# Altium PCB lagd_pcb.PcbDoc (part 7 of 7)
Units mm, origin at the board's own origin, x right, y up, seen from the top; angles counter-clockwise.
Board outline 172 x 145 mm, 6 copper layers (Top Layer, Layer 1, Layer 2, Layer 3, Layer 4, Bottom Layer), stack 0.816 mm thick; 588 components, 338 nets, 2165 pads, 565 vias.
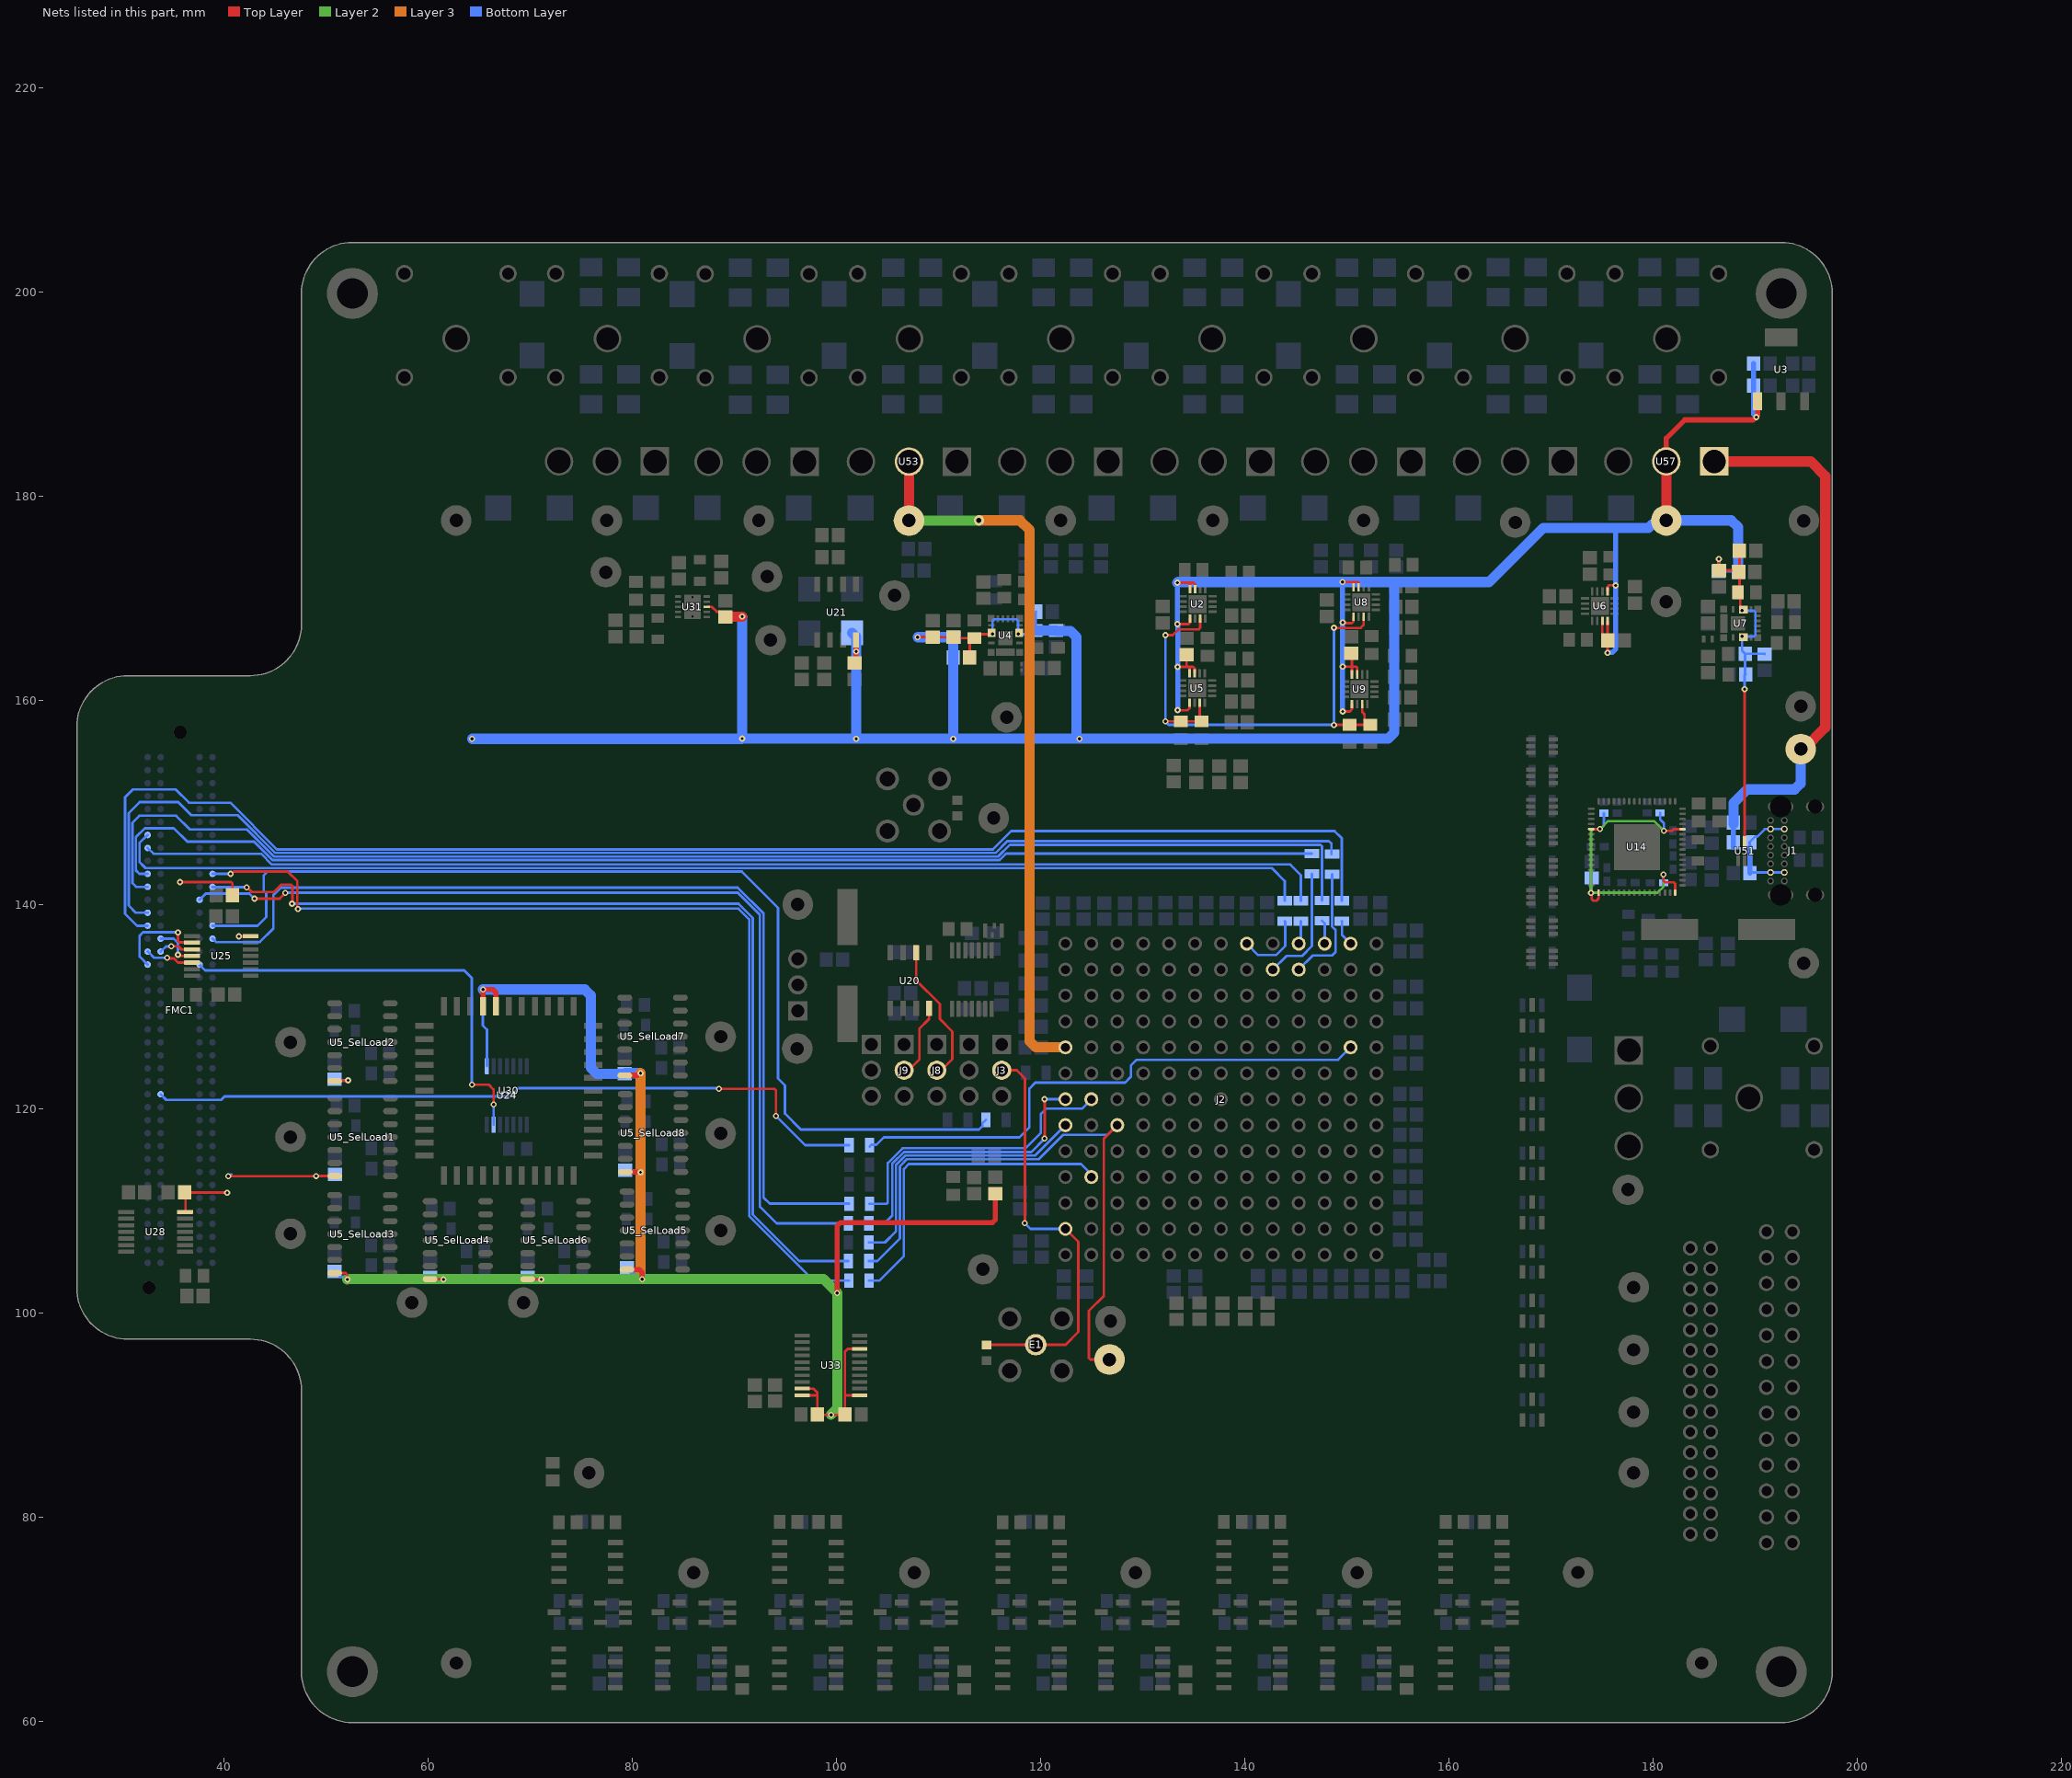
[diagram p10: the nets of this part, all layers, seen from the top]

## Via types
v1: diameter 0.6, hole 0.3, Top Layer to Bottom Layer, tented both sides, 505 vias
v2: diameter 0.3, hole 0.3, Top Layer to Bottom Layer, 20 vias
v3: diameter 0.55, hole 0.3, Top Layer to Bottom Layer, tented both sides, 18 vias
v4: diameter 0.55, hole 0.2, Top Layer to Bottom Layer, 16 vias
v5: diameter 0.6/0.6/0.6/0.6/0.6/0.6 (per signal layer), hole 0.3, Top Layer to Bottom Layer, tented both sides, 2 vias
v6: diameter 0.55/0.55/0.55/0.55/0.55/0.55 (per signal layer), hole 0.3, Top Layer to Bottom Layer, tented both sides, 2 vias
v7: diameter 1, hole 0.5, Top Layer to Bottom Layer, tented both sides, 2 vias

## Nets (pads, with @x,y where several pads share a name; then routed paths per layer and width w, separated by ;. In a path a pad name is that pad's centre, name@x,y a point inside that pad or via, vN(x,y) a via of type N, cw(c..) or ccw(c..) an arc to the next point about the centre after c; other vN are vias at no path point) (continued)
PLL_CFG_VLD_STRB_BUF: J2.F1 R87.2 | length 27.8
  Bottom Layer w0.25: R87.2@103.175,106.9 104.75,106.9 105.82,107.97 105.82,114.466 106.765,115.41 119.453,115.41 J2.F1@122.427,118.384
PLL_DATA_I: FMC1.C10 R39.1 | length 97.7
  Top Layer w0.25: v1(40.625,143) 40.72,143 40.942,143.223 46.227,143.223 47.175,142.275 47.175,139.613 v1(47.24,139.548)
  Bottom Layer w0.25: FMC1.C10@38.862,143.002 FMC1.C10@38.862,143.002 40.624,143.001 v1(40.625,143) ; v1(47.24,139.548) 47.29,139.598 90.393,139.598 91.45,138.54 91.45,109.48 97.78,103.15 R39.1@101.2,103.15
PLL_DATA_I_BUF: J2.D2 R39.2 | length 32.2
  Bottom Layer w0.25: R39.2@103.2,103.15 104.175,103.15 106.6,105.575 106.6,114.1 107.075,114.575 123.95,114.575 J2.D2@125.198,113.327
PLL_DATA_O: FMC1.C11 R86.1 | length 96.2
  Top Layer w0.25: v1(42.221,141.689) 42.249,141.689 42.712,141.225 44.9,141.225 45.625,141.95 46.55,141.95 46.696,141.804 46.696,140.119 v1(46.65,140.073)
  Bottom Layer w0.25: FMC1.C11@38.862,141.732 38.884,141.71 42.199,141.71 v1(42.221,141.689) ; v1(46.65,140.073) 90.413,140.073 91.8,138.685 91.8,109.625 96.35,105.075 R86.1@101.175,105.075
PLL_DATA_O_BUF: J2.F3 PDO.1 R86.2 | length 60
  Top Layer w0.25: PDO.1@126.75,95.425 124.871,95.425 124.725,95.571 124.725,100.2 126.2,101.675 126.2,117.077 J2.F3@127.507,118.384
  Bottom Layer w0.25: R86.2@103.175,105.075 104,105.075 106.2,107.275 106.2,114.35 106.91,115.06 119.835,115.06 122.214,117.439 126.562,117.439 J2.F3@127.507,118.384
PLL_LOCK: FMC1.C15 R85.1 | length 95.7
  Bottom Layer w0.25: FMC1.C15@38.862,136.652 38.876,136.652 39.203,136.325 43.5,136.325 44.825,137.65 44.825,140.925 45.548,141.648 90.322,141.648 92.85,139.12 92.85,111.3 93.45,110.7 R85.1@101.225,110.7
PLL_LOCK_BUF: J2.G2 R85.2 | length 29.3
  Bottom Layer w0.25: R85.2@103.225,110.675 104.879,110.675 105.025,110.821 105.025,114.66 106.49,116.125 118.525,116.125 120.025,117.625 120.025,119.5 120.525,120 124.043,120 J2.G2@124.967,120.924
PLL_STRB: FMC1.D12 R43.1 | length 94.4
  Top Layer w0.25: v1(42.975,140.575) 45.452,140.575 v1(46,141.123)
  Bottom Layer w0.25: FMC1.D12@37.592,140.462 38.205,141.075 42.475,141.075 v1(42.975,140.575) ; v1(46,141.123) 46.027,141.15 90.325,141.15 92.5,138.975 92.5,110.4 94.125,108.775 R43.1@101.175,108.775
PLL_STRB_BUF: J2.G1 R43.2 | length 29.5
  Top Layer w0.25: v1(120.375,117.087) 120.394,117.106 120.394,120.906 v1(120.375,120.925)
  Bottom Layer w0.25: R43.2@103.175,108.775 104.7,108.775 105.47,109.545 105.47,114.61 106.62,115.76 119.085,115.76 120.375,117.05 v1(120.375,117.087) ; v1(120.375,120.925) J2.G1@122.427,120.924
RST_NI: FMC1.G27 R1.1 | length 71.9
  Top Layer w0.25: v1(88.475,121.95) 88.487,121.938 93.929,121.938 94.075,121.791 v1(94.075,119.273)
  Bottom Layer w0.25: FMC1.G27@33.782,121.412 34.327,120.867 39.717,120.867 40.05,121.2 68.02,121.2 68.82,122 88.425,122 v1(88.475,121.95) ; v1(94.075,119.273) 96.923,116.425 R1.1@101.225,116.425
RST_NI_BUF: J2.J12 R1.2 | length 54
  Bottom Layer w0.25: R1.2@103.25,116.3 103.414,116.464 103.914,116.464 104.65,117.2 117.925,117.2 118.9,118.175 118.9,121.974 119.48,122.554 128.279,122.554 128.842,123.117 128.842,124.214 129.417,124.789 149.152,124.789 J2.J12@150.367,126.004
RTC_I: FMC1.C14 R84.1 | length 103.1
  Bottom Layer w0.25: FMC1.C14@38.862,137.922 43.272,137.922 44.125,138.775 44.125,141.107 43.875,141.357 43.875,142.826 44.271,143.223 45.25,143.223 90.727,143.223 94.275,139.675 94.275,122.962 94.95,122.287 94.95,119.52 96.505,117.965 113.965,117.965 114.29,118.29 114.29,118.565 R84.1@114.625,118.9
RTC_MUXED: E1.1 J2.B1 J3.2 R2.2 | length 41.3
  Top Layer w0.25: R2.2@114.7,97.065 114.89,96.875 E1.1@119.525,96.875 122.45,96.875 123.7,98.125 123.7,106.952 J2.B1@122.427,108.224 ; J3.2@116.134,123.764 117.667,123.764 118.467,122.964 v1@118.467,108.775
  Bottom Layer w0.25: v1@118.467,108.775 119.018,108.224 J2.B1@122.427,108.224
  other v1: 118.45,108.775
S0: J8.2 U20.6 | length 13.4
  Top Layer w0.25: U20.6@107.802,135.275 107.802,132.58 110.117,130.265 110.117,128.79 111.342,127.564 111.342,124.84 J8.2@110.267,123.764
S1: J9.2 U20.4 | length 7.3
  Top Layer w0.25: J9.2@106.624,123.764 107.063,123.764 108.117,124.819 108.117,127.84 109.072,128.795 U20.4@109.072,129.826
SPI_CS: FMC1.H8 R78.1 | length 116.6
  Bottom Layer w0.25: FMC1.H8@32.512,145.542 33.079,144.975 43.618,144.975 44.67,143.923 45.25,143.923 144.452,143.923 145.5,142.875 R78.1@145.5,140.375
SPI_CS_BUF: J2.N10 R78.2 | length 2.3
  Bottom Layer w0.25: J2.N10@145.287,136.164 145.5,136.377 R78.2@145.5,138.375
SPI_SCK: FMC1.H7 R42.1 | length 117.9
  Bottom Layer w0.25: FMC1.H7@32.512,146.812 31.708,146.008 31.708,144.167 32.122,143.753 32.302,143.573 142.652,143.573 143.925,142.3 R42.1@143.925,140.375
SPI_SCK_BUF: J2.N8 R42.2 | length 7
  Bottom Layer w0.25: J2.N8@140.207,136.164 141.322,135.05 143.075,135.05 143.975,135.95 143.975,138.325 R42.2@143.925,138.375
SPI_SD_0: FMC1.H10 R88.1 | length 121.7
  Bottom Layer w0.25: FMC1.H10@32.512,143.002 31.696,143.002 31.358,143.34 31.358,146.604 32.229,147.475 35.075,147.475 36.4,146.15 42.938,146.15 44.738,144.35 115.97,144.35 116.62,145 R88.1@146.575,145
SPI_SD_0_BUF: J2.M9 R88.2 | length 11.9
  Bottom Layer w0.25: J2.M9@142.747,133.624 144.087,134.964 145.614,134.964 146.575,135.925 R88.2@146.575,143
SPI_SD_1: FMC1.H11 R89.1 | length 131.9
  Bottom Layer w0.25: FMC1.H11@32.512,141.732 31.368,141.732 31.008,142.092 31.008,148.008 31.7,148.7 35.3,148.7 36.643,147.357 42.226,147.357 44.883,144.7 115.825,144.7 116.975,145.85 147.419,145.85 147.565,145.704 147.565,143.547 147.575,143.537 R89.1@147.575,140.4
SPI_SD_1_BUF: J2.N11 R89.2 | length 2.3
  Bottom Layer w0.25: R89.2@147.575,138.4 147.827,138.148 147.827,137.156 J2.N11@147.827,136.164
SPI_SD_2: FMC1.H13 R90.1 | length 133.1
  Bottom Layer w0.25: FMC1.H13@32.512,139.192 31.358,139.192 30.658,139.892 30.658,148.958 31.725,150.025 35.5,150.025 36.775,148.75 41.328,148.75 45.028,145.05 115.575,145.05 116.725,146.2 148.254,146.2 148.5,145.954 R90.1@148.5,144.95
SPI_SD_2_BUF: J2.M10 R90.2 | length 12
  Bottom Layer w0.25: J2.M10@145.287,133.624 146.677,135.014 148.542,135.014 148.892,135.364 148.892,137.494 148.565,137.822 R90.2@148.565,142.95
SPI_SD_3: FMC1.H14 R91.1 | length 143.2
  Bottom Layer w0.25: FMC1.H14@32.512,137.922 31.478,137.922 30.308,139.092 30.308,150.508 31.075,151.275 35.25,151.275 36.55,149.975 40.598,149.975 45.173,145.4 115.325,145.4 117.125,147.2 148.8,147.2 149.5,146.5 R91.1@149.5,140.375
SPI_SD_3_BUF: J2.N12 R91.2 | length 2.6
  Bottom Layer w0.25: R91.2@149.5,138.375 149.525,138.35 149.525,137.007 J2.N12@150.367,136.164
SR_DATA_I: FMC1.H16 U25.5 | length 4.8
  Top Layer w0.25: v1(34.425,134.775) 34.492,134.708 35.092,134.708 35.489,134.311 U25.5@36.858,134.311
  Bottom Layer w0.25: FMC1.H16@32.512,135.382 32.549,135.382 33.156,134.775 v1(34.425,134.775)
SR_DATA_O: FMC1.D17 U24.13 | length 43.4
  Top Layer w0.25: v1(64.275,122.35) 65.925,122.35 66.4,121.875 v1(66.4,120.425)
  Bottom Layer w0.25: FMC1.D17@37.592,134.112 38.154,133.55 63.525,133.55 64.275,132.8 v1(64.275,122.35) ; U24.13@66.4,118.43 v1(66.4,120.425)
SR_LE: FMC1.G15 U25.4 | length 4.5
  Top Layer w0.25: v1(35.475,135.075) 35.57,135.075 35.684,134.961 U25.4@36.858,134.961
  Bottom Layer w0.25: FMC1.G15@33.782,136.652 35.073,136.652 35.475,136.25 v1(35.475,135.075)
SR_OE: FMC1.G16 U25.3 | length 3.7
  Top Layer w0.25: v1(34.825,135.925) 34.833,135.917 35.5,135.917 35.817,135.6 U25.3@37.135,135.6
  Bottom Layer w0.15: v1@34.8,135.9 v1(34.825,135.925)
  Bottom Layer w0.25: FMC1.G16@33.782,135.382 34.3,135.9 v1@34.8,135.9
SR_SCK: FMC1.H17 U25.2 | length 9.6
  Top Layer w0.25: v1(35.475,137.275) 35.475,136.439 35.621,136.292 37.117,136.292 U25.2@37.16,136.25
  Bottom Layer w0.25: FMC1.H17@32.512,134.112 31.725,134.899 31.725,136.95 32.05,137.275 v1(35.475,137.275)
USB_5V: 1.1 C4.1 FB1.2 U57.1 | length 54.5
  Top Layer w1: U57.1@185.998,183.4 195.45,183.4 196.875,181.975 196.875,157.325 194.775,155.225 1.1@194.475,155.225
  Bottom Layer w0.5: FB1.2@187.884,145.612 C4.1@187.884,147.898
  Bottom Layer w1: C4.1@187.884,147.898 187.884,149.934 189.225,151.275 193.889,151.275 194.475,151.861 1.1@194.475,155.225
VBIAS: C13.2 C14.2 C15.2 C16.2 C17.2 C18.2 C19.2 C20.2 C21.2 C34.2 C35.2 C36.2 C37.2 C38.2 C39.2 C40.2 C41.2 C42.2 C50.2 C60.2 C61.2 C188.2 C192.2 C203.2 C204.2 C205.2 C209.2 C220_SelLoad1.2 C220_SelLoad2.2 C220_SelLoad3.2 C220_SelLoad4.2 C220_SelLoad5.2 C220_SelLoad6.2 C220_SelLoad7.2 C220_SelLoad8.2 C239.2 D1.1 R11.2 R24.2 U2.5 U2.15 U2.16 U3.1 U4.3 U4.9 U5.5 U5.15 U5.16 U5_SelLoad1.14 U5_SelLoad2.14 U5_SelLoad3.14 U5_SelLoad4.14 U5_SelLoad5.14 U5_SelLoad6.14 U5_SelLoad7.14 U5_SelLoad8.14 U6.5 U6.15 U6.16 U7.3 U7.9 U8.5 U8.15 U8.16 U9.5 U9.15 U9.16 U21.8 U24.1 U25.14 U28.14 U30.24 U30.25 U31.3 U33.1 U33.8 U33.19 U33.20 U51.5 U57.2 VDD5V.1 | length 577.1
  Top Layer w0.25: v1@35.548,142.198 40.679,142.198 40.825,142.052 C192.2@40.825,140.925 ; C203.2@36.125,111.825 C203.2@36.175,111.775 ; U28.14@36.214,109.881 36.214,111.736 C203.2@36.175,111.775 ; v1(40.3,111.775) C203.2@36.175,111.775 ; v1(40.4,113.375) 40.412,113.387 49.013,113.387 v1(49.025,113.4) 49.027,113.402 50.848,113.402 U5_SelLoad1.14@50.85,113.405 ; v1(41.446,136.875) U25.14@42.728,136.875 ; U5_SelLoad3.14@50.825,103.905 51.808,103.905 51.908,103.905 52.075,103.738 v1(52.075,103.275) ; U5_SelLoad2.14@50.825,122.705 50.86,122.74 52.115,122.74 v1(52.15,122.775) ; U5_SelLoad4.14@60.175,103.305 60.19,103.29 61.485,103.29 v1(61.5,103.275) ; U5_SelLoad6.14@69.75,103.305 69.765,103.29 71.06,103.29 v1(71.075,103.275) ; U31.3@87.288,169.162 87.786,169.162 88.262,168.687 88.537,168.687 88.862,168.361 C239.2@88.862,168.086 ; U33.20@96.636,91.925 98.1,91.925 98.125,91.9 ; U33.19@96.636,92.575 97.75,92.575 98.125,92.2 98.125,91.9 ; 100.85,91.925 U33.1@102.275,91.925 ; C209.2@101.785,163.653 C209.2@101.912,163.78 ; U33.8@102.275,96.475 101.1,96.475 100.825,96.2 C205.2@100.825,90.05 100.775,90 v1(99.475,90) 98.175,90 C204.2@98.125,90.05 98.125,91.9 ; v1(107.95,166.2) 109.437,166.2 C20.2@109.447,166.19 C16.2@111.472,166.19 ; C16.2@111.772,166.49 C16.2@111.472,166.19 ; C19.2@113.047,164.215 113.047,165.64 R11.2@113.497,166.09 ; v3(115.297,166.49) 113.897,166.49 R11.2@113.497,166.09 ; v1(133.402,171.522) 134.632,171.522 ; v1(133.421,159.044) 133.402,159.025 134.375,159.025 134.59,159.24 U5.5@134.59,159.748 U5.5@134.592,159.75 ; v1(133.425,163.275) 133.421,163.279 133.402,163.279 134.292,163.279 ; v1@133.667,167.471 134.484,167.471 134.63,167.618 134.63,167.99 U2.5@134.632,167.992 ; C21.2@134.29,164.471 134.29,163.281 134.292,163.279 ; U5.16@134.59,162.644 134.59,163.279 ; U2.16@134.632,170.887 134.632,171.522 ; U5.15@135.088,162.646 135.088,163.139 134.948,163.279 134.59,163.279 ; U2.15@135.13,170.889 135.13,171.382 134.99,171.522 134.632,171.522 ; v1(149.567,171.589) 150.65,171.589 ; v1(149.592,163.305) 150.507,163.305 ; v1(149.592,167.617) 149.644,167.564 150.502,167.564 150.648,167.711 150.648,168.173 U8.5@150.65,168.175 ; 149.909,158.915 150.29,158.915 150.505,159.13 150.505,159.638 U9.5@150.507,159.64 ; C50.2@150.427,164.618 150.507,164.538 150.507,163.305 ; U9.16@150.507,162.536 150.507,163.305 ; U8.16@150.65,171.07 150.65,171.589 ; U9.15@151.008,162.536 151.008,163.181 150.883,163.305 150.507,163.305 ; U8.15@151.15,171.07 151.148,171.072 151.148,171.543 151.102,171.589 150.65,171.589 ; U6.15@175.036,167.783 175.036,166.596 175.05,166.582 175.05,166.4 175.55,165.9 v1(175.55,164.65) ; C42.2@175.536,165.964 U6.16@175.536,167.783 ; U6.5@175.536,170.679 175.538,170.681 175.538,171.129 175.685,171.275 176.3,171.275 v1(176.325,171.25) ; v1(186.45,173.85) 186.45,172.756 C40.2@186.471,172.736 188.421,172.736 C37.2@188.471,172.686 ; C41.2@188.471,174.661 C37.2@188.471,172.686 ; v3(188.721,168.786) 188.546,168.961 188.546,170.336 R24.2@188.321,170.561 188.471,170.711 C37.2@188.471,172.686 ; U51.5@188.976,146.183 v1(188.975,161.1) ; C16.2@111.472,166.19 111.572,166.09 R11.2@113.497,166.09 ; 134.292,163.279 134.59,163.279
  Top Layer w0.5: U30.25@65.36,130.03 U30.25@65.36,130.03 65.359,131.674 v1(65.358,131.675) 66.337,131.675 66.63,131.382 U30.24@66.63,130.03 ; U5_SelLoad7.14@79.25,123.255 79.269,123.274 80.447,123.274 80.648,123.475 v1@80.675,123.475 ; U5_SelLoad8.14@79.3,113.805 79.315,113.79 80.61,113.79 v1@80.625,113.775 ; U5_SelLoad5.14@79.49,104.24 80.657,104.24 80.95,103.947 v1(80.95,103.3) ; v1(100.075,101.95) 100.075,108.525 100.4,108.85 115.274,108.85 115.567,109.143 C188.2@115.567,111.689 ; C209.2@101.912,163.78 U21.8@101.912,165.914 ; U57.2@181.299,183.4 181.299,185.674 183.1,187.475 189.823,187.475 190.098,187.75 v1(190.125,187.75) 190.125,187.777 190.25,187.902 U3.1@190.25,189.3
  Top Layer w1: C239.2@89.112,168.162 89.151,168.2 v1(90.75,168.2) ; VDD5V.1@181.299,177.625 U57.2@181.299,183.4
  Layer 2 w1: v1(52.075,103.275) 52.1,103.3 v1@71.075,103.3 ; v1@71.1,103.3 v1(80.95,103.3) 98.725,103.3 v1(100.075,101.95) 100.075,90.638 v1@99.45,90.013
  Layer 3 w1: v1(80.8,123.475) v1(80.8,113.775) 80.8,103.45 v1(80.95,103.3)
  Bottom Layer w0.25: v1(40.4,113.375) 40.495,113.375 40.695,113.575 ; v1(49.025,113.4) 50.675,113.4 C220_SelLoad1.2@50.85,113.575 ; C220_SelLoad3.2@50.825,104.075 51.35,103.55 51.705,103.55 51.98,103.275 v1(52.075,103.275) ; C220_SelLoad2.2@50.825,122.875 50.925,122.775 v1(52.15,122.775) ; C220_SelLoad4.2@60.175,103.475 60.375,103.275 v1(61.5,103.275) ; v1(65.358,131.675) 65.358,128.142 65.75,127.75 U24.1@65.75,124.17 ; C220_SelLoad6.2@69.75,103.475 69.95,103.275 v1(71.075,103.275) ; C220_SelLoad8.2@79.3,113.975 C220_SelLoad8.2@79.5,113.775 ; C17.2@111.437,166.154 111.438,166.155 C17.2@111.472,166.19 ; C17.2@111.522,166.19 C17.2@112.047,166.715 ; v3(115.297,166.49) 115.297,167.793 115.444,167.939 117.642,167.939 117.797,167.785 v3(117.797,166.49) 119.142,166.49 C13.2@119.492,166.839 ; C13.2@119.193,166.485 C13.2@119.497,166.789 ; C13.2@119.497,166.844 119.497,168.646 C15.2@119.537,168.685 ; v1(175.55,164.65) v1@175.617,164.717 ; v1(186.45,173.85) 186.45,172.64 C39.2@186.446,172.636 188.296,172.636 C38.2@188.346,172.586 ; v3(188.721,168.786) 189.879,168.786 190.025,168.639 190.025,166.4 189.875,166.25 188.756,166.25 v3(188.721,166.286) 188.721,164.861 C34.2@189.02,164.561 ; v1(188.975,161.1) 188.975,162.44 C35.2@189.07,162.536 189.02,162.586 C34.2@189.02,164.561 ; C36.2@190.921,164.536 190.895,164.561 C34.2@189.02,164.561
  Bottom Layer w0.5: C220_SelLoad8.2@79.5,113.775 v1@80.625,113.775 ; C220_SelLoad5.2@79.675,104.225 79.725,104.225 80.631,103.319 80.931,103.319 v1(80.95,103.3) ; v1(133.402,171.522) v1(133.402,167.471) v1@133.421,167.452 ; v1(133.421,159.044) 133.421,159.115 133.425,159.119 v1(133.425,163.275) 133.425,167.421 133.421,167.425 133.421,167.444 v1@133.425,167.448 ; v1@133.421,163.279 133.402,163.279 133.402,163.306 v1@133.442,163.346 ; v1(149.592,158.915) v1(149.592,163.305) v1(149.592,167.617) 149.58,167.629 149.58,171.552 v1@149.592,171.565 ; v1@175.617,164.717 176.036,164.717 176.325,165.006 v1(176.325,171.25) 176.325,176.875 176.475,177.025 ; C61.2@189.856,192.979 C60.2@189.856,190.82 189.856,188.046 190.125,187.777 v1(190.125,187.75)
  Bottom Layer w1: v1(64.3,156.225) 90.725,156.225 v1(90.75,156.25) v1(90.75,168.2) ; v1(65.358,131.675) 75.339,131.675 75.925,131.089 75.925,124.011 76.511,123.425 C220_SelLoad7.2@79.25,123.425 79.3,123.475 v1@80.675,123.475 ; v1@90.76,156.239 v1(101.925,156.239) ; D1.1@101.531,166.624 101.925,166.23 v1(101.925,164.775) v1(101.925,156.239) ; v1@107.95,166.19 C17.2@111.438,166.19 ; C18.2@111.438,164.209 v1(111.438,156.239) ; C18.2@111.437,164.21 111.438,166.155 C17.2@111.438,166.19 ; C17.2@111.472,166.19 C17.2@111.438,166.19 ; C13.2@119.492,166.839 C14.2@121.522,166.839 121.584,166.778 122.932,166.778 123.517,166.192 v1@123.517,156.25 ; v1(133.402,171.522) 133.469,171.589 v1(149.567,171.589) 154.625,171.589 ; C38.2@188.346,172.586 188.346,176.954 187.675,177.625 VDD5V.1@181.299,177.625 180.916,177.242 179.93,177.242 179.563,176.875 176.325,176.875 169.225,176.875 163.939,171.589 154.625,171.589 ; v1(101.925,156.239) v1(111.438,156.239) ; v1(111.438,156.239) v1(123.8,156.239) 154.039,156.239 154.625,156.825 154.625,171.589
  other v1: 35.675,142.198
VBUS: C3.1 FB1.1 J1.2 J1.7 J1.10 J1.15 | length 10.1
  Bottom Layer w0.25: FB1.1@189.475,145.95 189.475,146.125 190,146.65 190.175,146.65 190.187,146.662 190.237,146.662 190.965,147.39 J1.15@192.866,147.39 ; C3.1@189.484,143.072 189.552,143.14 J1.2@191.516,143.14 J1.10@192.866,143.14
  Bottom Layer w0.5: C3.1@189.484,143.072 FB1.1@189.484,145.662
Vcore1: C64.2 C65.2 C66.1 C90.2 U14.12 U14.37 U14.49 U14.64 | length 36
  Top Layer w0.25: v1(173.925,141.15) 173.992,141.083 173.992,140.529 174.146,140.375 174.45,140.375 174.668,140.593 U14.49@174.668,141.16 ; U14.37@173.943,147.385 v1(174.815,147.385) ; v1(181.025,142.95) 181.025,142.321 181.171,142.175 182.022,142.175 182.168,142.029 U14.64@182.168,141.16 ; v1(181.068,147.217) 181.832,147.217 182,147.385 U14.12@182.893,147.385
  Layer 2 w0.25: v1(181.025,142.95) 181.025,141.75 180.425,141.15 v1(173.925,141.15) 173.925,147.15 174.14,147.365 174.795,147.365 v1(174.815,147.385) 175.605,148.175 180.11,148.175 180.495,147.79 v1(181.068,147.217)
  Bottom Layer w0.25: v1(173.925,141.15) 173.925,142.525 C90.2@174,142.6 ; v1(174.815,147.385) 175.175,147.745 C64.2@175.175,148.95 ; C66.1@180.7,148.975 180.7,148.321 181.068,147.953 v1(181.068,147.217) ; C65.2@181.025,142.125 v1(181.025,142.95)
VPLL: J2.J1 U53.2 VPLL.1 | length 77.6
  Top Layer w1: VPLL.1@107.1,177.615 U53.2@107.1,183.39
  Layer 2 w1: VPLL.1@107.1,177.615 v7@113.94,177.615
  Layer 3 w1: VPLL.1@107.1,177.615 U53.2@107.1,183.39 ; v7(113.95,177.625) 117.989,177.625 118.9,176.714 118.9,126.59 119.486,126.004 J2.J1@122.427,126.004
  Bottom Layer w1: VPLL.1@107.075,177.589 VPLL.1@107.1,177.615
VREF: R14.2 R15.2 R74.2 R75.2 U2.7 U5.7 U8.7 U9.7 | length 54.4
  Top Layer w0.25: v1@132.217,157.946 R14.2@133.715,157.946 R15.2@135.775,157.946 ; v1(132.217,166.389) 132.94,166.389 133.497,166.946 135.468,166.946 135.631,167.109 135.631,167.99 U2.7@135.633,167.992 ; U5.7@135.59,159.748 135.59,158.131 R15.2@135.775,157.946 ; R15.2@135.783,157.938 R15.2@135.775,157.946 ; v1(148.742,157.594) R74.2@150.253,157.594 R75.2@152.185,157.594 ; v1(148.742,167.114) 148.765,167.092 149.632,167.092 149.634,167.093 151.341,167.093 151.65,167.403 U8.7@151.65,168.175 ; U9.7@151.508,159.64 151.508,158.849 151.735,158.621 151.735,158.044 R75.2@152.185,157.594 ; R75.2@152.285,157.594 R75.2@152.185,157.594
  Bottom Layer w0.25: v1(132.217,166.389) 132.217,157.916 132.539,157.594 v1(148.742,157.594) v1(148.742,167.114)
  other v1: 132.217,157.939
pads on no net: FMC1. FMC1.C2 FMC1.C3 FMC1.C6 FMC1.C7 FMC1.C18 FMC1.C19 FMC1.C22 FMC1.C23 FMC1.C27 FMC1.C30 FMC1.C31 FMC1.C34 FMC1.C35 FMC1.C37 FMC1.C39 FMC1.D1 FMC1.D4 FMC1.D5 FMC1.D8 FMC1.D9 FMC1.D18 FMC1.D20 FMC1.D21 FMC1.D23 FMC1.D24 FMC1.D26 FMC1.D27 FMC1.D29 FMC1.D30 FMC1.D31 FMC1.D32 FMC1.D33 FMC1.D34 FMC1.D35 FMC1.D36 FMC1.D38 FMC1.D40 FMC1.G2 FMC1.G3 FMC1.G6 FMC1.G7 FMC1.G9 FMC1.G10 FMC1.G13 FMC1.G18 FMC1.G19 FMC1.G21 FMC1.G22 FMC1.G24 FMC1.G25 FMC1.G28 FMC1.G30 FMC1.G31 FMC1.G33 FMC1.G34 FMC1.G36 FMC1.G39 FMC1.H1 FMC1.H2 FMC1.H4 FMC1.H5 FMC1.H19 FMC1.H20 FMC1.H22 FMC1.H23 FMC1.H25 FMC1.H26 FMC1.H28 FMC1.H29 FMC1.H31 FMC1.H32 FMC1.H34 FMC1.H35 FMC1.H40 J1.6 J1.11 J2.A1 J2.A4 J2.C3 J2.C4 J2.C5 J2.C9 J2.C10 J2.C11 J2.D3 J2.D4 J2.D5 J2.D6 J2.D7 J2.D8 J2.D9 J2.D10 J2.D11 J2.D13 J2.E3 J2.E4 J2.E5 J2.E6 J2.E7 J2.E8 J2.E9 J2.E10 J2.E11 J2.F4 J2.F5 J2.F6 J2.F7 J2.F8 J2.F9 J2.F10 J2.G4 J2.G5 J2.G6 J2.G7 J2.G8 J2.G9 J2.G10 J2.H4 J2.H5 J2.H6 J2.H7 J2.H8 J2.H9 J2.H10 J2.J3 J2.J4 J2.J5 J2.J6 J2.J7 J2.J8 J2.J9 J2.J10 J2.J11 J2.K3 J2.K4 J2.K5 J2.K6 J2.K7 J2.K8 J2.K9 J2.K10 J2.K11 J2.L2 J2.L3 J2.L4 J2.L5 J2.L9 J2.L10 J2.L11 J6.28 P_3.3V_EXT.2 P_3.3V_EXT.3 P_3.3V_EXT.4 P_3.3V_EXT.5 P_5V.2 P_5V.3 P_5V.4 P_5V.5 P_9V.2 P_9V.3 P_9V.4 P_9V.5 P_CORE.2 P_CORE.3 P_CORE.4 P_CORE.5 P_GALENA1.2 P_GALENA1.3 P_GALENA1.4 P_GALENA1.5 P_GALENA2.2 P_GALENA2.3 P_GALENA2.4 P_GALENA2.5 P_GND1.2 P_GND1.3 P_GND1.4 P_GND1.5 P_IO.2 P_IO.3 P_IO.4 P_IO.5 P_m3V.2 P_m3V.3 P_m3V.4 P_m3V.5 P_PLL.2 P_PLL.3 P_PLL.4 P_PLL.5 U6_U_sink_iref_gen1.4 U6_U_sink_iref_gen2.4 U6_U_sink_iref_gen3.4 U6_U_sink_iref_gen4.4 U6_U_sink_iref_gen5.4 U14.21 U14.22 U14.23 U14.24 U14.26 U14.27 U14.28 U14.29 U14.30 U14.32 U14.33 U14.34 U14.36 U14.43 U14.44 U14.45 U14.46 U14.48 U14.52 U14.53 U14.54 U14.55 U14.57 U14.58 U14.59 U14.60 U14.63 U21.1 U21.6 U21.7 U22_source_iref1.4 U22_source_iref2.4 U22_source_iref3.4 U22_source_iref4.4 U22_source_iref5.4 U22_source_iref_01.4 U22_source_iref_02.4 U22_source_iref_03.4 U22_source_iref_04.4 U24.3 U24.4 U24.5 U24.6 U24.9 U24.10 U24.11 U24.12 U25.6 U25.9 U28.5 U28.6 U28.9 U28.10 U29.2 U30.19 U30.20 U30.21 U30.29 U32.2 U34.2 U35.2 U36.2 U37.2 U38.2 U39.2 U40.2 U41.2 U42.2 U43.2 U44.2 U45.2 U46.2 U47.2 U48.2 U49.2 U50.4 U50.5 U50.6 U50.9 U50.10 U50.11 U51.3 U51.4 XTAL1.1

## Polygon pours and split planes (outlines as drawn)
A0 on Bottom Layer "Bottom Layer-A0" (solid, pour order 80): 30.566,97.42 42.568,97.42 cw(c42.568,92.42) 47.568,92.42 47.566,92.42 47.566,64.859 ccw(c52.566,64.859) 52.566,59.859 68.775,59.859 68.775,175.55 68.8,175.55 68.8,200.925 188.025,200.925 188.025,175.8 166.425,175.8 166.425,129.6 166.4,129.575 166.4,114.379 183.999,114.379 184,114.38 184,129.6 194.87,129.6 194.87,114.4 197.575,114.4 197.575,129.591 197.566,129.6 197.566,175.023 197.575,175.023 197.575,200.916 197.566,200.925 197.566,204.85 68.809,204.85 68.8,204.859 52.566,204.859 ccw(c52.566,199.859) 47.566,199.859 47.568,199.861 47.568,167.42 cw(c42.568,167.42) 42.568,162.42 30.568,162.42 ccw(c30.568,157.42) 25.568,157.42 25.568,102.42 ccw(c30.568,102.42)
NetC1_1 on Bottom Layer "NONET_L03_P-001" (solid, pour order 76): 194.849,129.279 194.849,114.379 183.624,114.379 183.999,114.379 183.999,129.279
NetC221_1 on Bottom Layer "NONET_L03_P-001" (solid, pour order 9): 158.225,200.875 173.125,200.875 173.125,189.65 173.125,190.025 158.225,190.025
NetC233_1 on Bottom Layer "NONET_L03_P-001" (solid, pour order 8): 69.224,200.875 84.124,200.875 84.124,189.65 84.124,190.025 69.224,190.025
NetC236_1 on Bottom Layer "NONET_L03_P-001" (solid, pour order 7): 83.758,200.839 98.658,200.839 98.658,189.614 98.658,189.989 83.758,189.989
NetC5_1 on Bottom Layer "NONET_L03_P-001" (solid, pour order 3): 128.015,200.876 142.915,200.876 142.915,189.651 142.915,190.026 128.015,190.026
NetC101_1 on Bottom Layer "NONET_L03_P-001" (solid, pour order 5): 113.347,200.865 128.247,200.865 128.247,189.639 128.247,190.014 113.347,190.014
NetC104_1 on Bottom Layer "NONET_L03_P-001" (solid, pour order 6): 143.117,200.865 158.017,200.865 158.017,189.639 158.017,190.014 143.117,190.014
NetC8_1 on Bottom Layer "NONET_L03_P-001" (solid, pour order 4): 98.454,200.876 113.354,200.876 113.354,189.651 113.354,190.026 98.454,190.026
NetC224_1 on Bottom Layer "NONET_L03_P-001" (solid, pour order 10): 173.125,200.875 188.025,200.875 188.025,189.65 188.025,190.025 173.125,190.025
3V3_MUXED on Layer 3 "Layer 3-3V3_MUXED" (solid, pour order 75): 175.146,109.961 197.566,109.961 197.566,131.6 197.566,158.075 197.575,186.65 197.575,204.864 100.425,204.859 100.6,92.775 118.35,92.775 118.35,186.753 188.825,186.661 188.825,158.075 166.425,158.075 166.425,131.6 175.175,131.6
0.75V on Layer 3 "Layer 3-0.75V" (solid, pour order 69): 161.4,92.825 175.15,92.775 175.15,131.375 161.075,131.375 161.075,96.625 132.35,96.625 132.273,102.15 143.95,102.15 143.95,106.9 151.7,106.9 151.7,109.5 149.067,109.5 149.067,120.775 154.25,120.775 154.25,138.6 149.067,138.6 149.067,185.989 128.375,185.965 128.375,156.054 135.2,156.054 135.2,123.425 118.35,123.425 118.35,92.775
VBIAS on Layer 3 "VBIAS_L04_P065" (solid, pour order 65): 30.566,97.42 42.568,97.42 cw(c42.568,92.42) 47.568,92.42 47.566,92.42 47.566,64.859 ccw(c52.566,64.859) 52.566,59.859 65.6,59.859 65.6,204.859 52.566,204.859 ccw(c52.566,199.859) 47.566,199.859 47.568,199.861 47.568,167.42 cw(c42.568,167.42) 42.568,162.42 30.568,162.42 ccw(c30.568,157.42) 25.568,157.42 25.568,102.42 ccw(c30.568,102.42)
HUI0- on Layer 3 "Layer 3-HUI0-" (solid, pour order 64): 84.7,75.878 184.625,76.003 184.625,83.725 192.425,83.725 192.425,87.575 189.8,87.575 189.8,91.425 195.075,91.425 195.075,95.248 189.9,95.248 189.9,99.025 192.35,99.025 192.35,104.25 194.875,104.25 194.875,109.986 182.475,109.961 182.475,92.42 100.425,92.42 100.425,204.859 84.7,204.859
Galena_1_0V75 on Layer 3 "Layer 3-Galena_1_0V75" (solid, pour order 45): 128.375,123.4 128.375,123.464 135.127,123.464 135.127,156.05 128.375,156.05 128.375,185.965 118.35,185.965 118.35,123.4
Galena_2_0V75 on Layer 3 "Layer 3-Galena_2_0V75" (solid, pour order 58): 132.35,96.625 161.075,96.625 161.075,185.925 158.775,185.925 158.75,185.9 149.067,185.9 149.067,138.608 149.075,138.6 154.25,138.6 154.25,120.775 149.092,120.775 149.092,109.5 151.775,109.5 151.775,106.9 143.95,106.9 143.95,102.225 132.35,102.225
HDI0+ on Layer 3 "Layer 3-HDI0+" (solid, pour order 62): 65.875,59.859 197.567,59.858 197.566,76.65 197.566,83.725 197.566,109.986 194.875,109.986 194.875,104.25 192.425,104.25 192.425,99.05 189.9,99.05 189.9,95.248 195.075,95.248 195.075,91.425 189.8,91.425 189.8,87.575 192.425,87.575 192.425,83.725 184.775,83.725 184.775,76.025 84.7,76.025 84.7,204.859 65.875,204.859
1.0V on Top Layer "NONET_L03_P-001" (solid, pour order 29): 150.967,176.025 114.342,176.025 114.342,156.052 150.967,156.052
2.0V on Top Layer "NONET_L03_P-001" (solid, pour order 42): 185.371,165.5 175.2,165.5 175.2,172.325 185.371,172.325
NetC56_2 on Top Layer "NONET_L03_P-001" (solid, pour order 25): 155.442,165.664 153.517,165.664 153.517,163.34 153.514,163.343 151.966,163.343 151.966,158.899 155.442,158.899
NetC53_2 on Top Layer "NONET_L03_P-001" (solid, pour order 26): 155.692,174.389 152.216,174.389 152.216,172.068 152.216,167.624 155.692,167.624
NetC23_2 on Top Layer "NONET_L03_P-001" (solid, pour order 27): 139.492,174.039 136.016,174.039 136.016,172.068 136.016,167.624 139.492,167.624
NetC30_2 on Top Layer "NONET_L03_P-001" (solid, pour order 28): 139.499,165.513 137.192,165.513 137.192,163.564 135.817,163.564 135.817,158.747 139.499,158.747
PCB_IO_1V8 on Top Layer "NONET_L03_P-001" (solid, pour order 40): 174.536,166.927 174.325,166.927 170.45,166.846 170.45,172.325 174.536,172.325
A0 on Layer 4 "A0_L05_P067" (solid, pour order 67): 30.566,97.42 42.568,97.42 cw(c42.568,92.42) 47.568,92.42 47.566,92.42 47.566,64.859 ccw(c52.566,64.859) 52.566,59.859 192.566,59.859 ccw(c192.566,64.859) 197.566,64.859 197.566,199.859 ccw(c192.566,199.859) 192.566,204.859 52.566,204.859 ccw(c52.566,199.859) 47.566,199.859 47.568,199.861 47.568,167.42 cw(c42.568,167.42) 42.568,162.42 30.568,162.42 ccw(c30.568,157.42) 25.568,157.42 25.568,102.42 ccw(c30.568,102.42)
A0 on Layer 1 "A0_L02_P000" (solid, pour order 0): 30.566,97.42 42.568,97.42 cw(c42.568,92.42) 47.568,92.42 47.566,92.42 47.566,64.859 ccw(c52.566,64.859) 52.566,59.859 192.566,59.859 ccw(c192.566,64.859) 197.566,64.859 197.566,199.859 ccw(c192.566,199.859) 192.566,204.859 52.566,204.859 ccw(c52.566,199.859) 47.566,199.859 47.568,199.861 47.568,167.42 cw(c42.568,167.42) 42.568,162.42 30.568,162.42 ccw(c30.568,157.42) 25.568,157.42 25.568,102.42 ccw(c30.568,102.42)
A2 on Layer 2 "A2_L03_P001" (solid, pour order 1): 30.566,97.42 42.568,97.42 cw(c42.568,92.42) 47.568,92.42 47.566,92.42 47.566,64.859 ccw(c52.566,64.859) 52.566,59.859 192.566,59.859 ccw(c192.566,64.859) 197.566,64.859 197.566,199.859 ccw(c192.566,199.859) 192.566,204.859 52.566,204.859 ccw(c52.566,199.859) 47.566,199.859 47.568,199.861 47.568,167.42 cw(c42.568,167.42) 42.568,162.42 30.568,162.42 ccw(c30.568,157.42) 25.568,157.42 25.568,102.42 ccw(c30.568,102.42)

## Silkscreen, mask and mechanical layers (free items; w line width, h text height)
Top Overlay:
  text "LAGD V2" at 52.625,165.278 h5
  text "JV 1359" at 171.769,60.685 h3
Mechanical 1:
  lines w0.051: 51.4,177.625 151.659,177.625 ; 62.738,171.338 62.738,195.441 182.499,195.441 ; 77.558,174.658 77.558,183.4 ; 77.558,195.441 77.558,183.4 ; 92.378,172.872 92.378,183.4 92.378,195.441 ; 107.198,175.073 107.198,183.4 107.198,195.441 ; 122.018,174.082 122.018,183.4 122.018,195.441 ; 122.018,188.337 151.659,188.337 ; 136.839,174.425 136.839,188.337 136.839,197.189 ; 141.549,174.824 141.549,183.4 ; 151.659,174.159 151.659,183.4 ; 151.659,195.441 151.659,177.625 ; 166.479,173.421 166.479,183.4 166.479,195.441 166.479,183.639 ; 180.3,169.775 181.299,170.774 181.299,195.441 ; 181.399,183.4 77.558,183.4 ; 185.998,173.727 185.998,183.4 ; 194.775,155.225 194.775,177.625 ; 194.775,177.586 194.775,188.9 ; 199.05,177.625 151.659,177.625
Mechanical 2:
  lines w0.051: 25.568,102.42 ccw(c30.568,102.42) 30.566,97.42 42.568,97.42 42.568,97.42 cw(c42.568,92.42) 47.568,92.42 47.566,92.42 47.566,64.859 ccw(c52.566,64.859) 52.566,59.859 192.566,59.859 ccw(c192.566,64.859) 197.566,64.859 197.566,199.859 ccw(c192.566,199.859) 192.566,204.859 52.566,204.859 ccw(c52.566,199.859) 47.566,199.859 47.568,199.861 47.568,167.42 cw(c42.568,167.42) 42.568,162.42 30.568,162.42 ccw(c30.568,157.42) 25.568,157.42 25.568,102.42

## Text inside footprints (layer, text, board x,y; h text height)
J2: Top Overlay "N" at 115.125,135.529 h1.27; Top Overlay "1" at 123.062,106.472 h1.27 r90; Top Overlay "13" at 153.542,105.837 h1.27 r90; Top 3D Body "N" at 115.125,135.529 h1.27; Top 3D Body "A" at 115.167,105.014 h1.27; Top 3D Body "1" at 123.062,106.472 h1.27 r90; Top 3D Body "13" at 153.542,105.837 h1.27 r90; Bottom Overlay "N" at 115.76,135.529 h1.27; Bottom Overlay "1" at 121.792,106.472 h1.27 r270; Bottom Overlay "13" at 152.272,105.837 h1.27 r270
J6: Top Overlay "REFDES" at 184.019,94.549 h1.27 r270; Top Overlay "RefDes" at 184.019,94.232 h1.27 r270; Top 3D Body "RefDes2" at 184.019,94.549 h1.27 r270
U1: Top Overlay "*" at 173.497,125.089 h1.27; Top 3D Body "*" at 174.386,125.089 h1.27
U2: Top Overlay "*" at 132.558,170.039 h1.27; Top 3D Body "*" at 134.024,169.805 h1.27
U5: Top Overlay "*" at 132.315,162.221 h1.27; Top 3D Body "*" at 133.981,161.561 h1.27
U6: Top Overlay "*" at 177.719,168.266 h1.27 r180; Top 3D Body "*" at 176.145,168.866 h1.27 r180
U6_U_sink_iref_gen1: Top Overlay "*" at 72.235,77.886 h1.27; Top 3D Body "*" at 73.606,76.743 h1.27
U6_U_sink_iref_gen2: Top Overlay "*" at 93.86,77.886 h1.27; Top 3D Body "*" at 95.231,76.743 h1.27
U6_U_sink_iref_gen3: Top Overlay "*" at 115.735,77.886 h1.27; Top 3D Body "*" at 117.106,76.743 h1.27
U6_U_sink_iref_gen4: Top Overlay "*" at 135.975,78.05 h1.27; Top 3D Body "*" at 138.756,76.743 h1.27
U6_U_sink_iref_gen5: Top Overlay "*" at 157.725,78.05 h1.27; Top 3D Body "*" at 160.482,76.743 h1.27
U8: Top Overlay "*" at 148.602,170.816 h1.27; Top 3D Body "*" at 150.041,169.988 h1.27
U8_source_iref1: Top Overlay "*" at 79.898,69.289 h1.27 r180; Top 3D Body "*" at 79.047,70.254 h1.27 r180
U8_source_iref2: Top Overlay "*" at 101.523,69.289 h1.27 r180; Top 3D Body "*" at 100.672,70.254 h1.27 r180
U8_source_iref3: Top Overlay "*" at 123.398,69.289 h1.27 r180; Top 3D Body "*" at 122.547,70.254 h1.27 r180
U8_source_iref4: Top Overlay "*" at 145.048,69.289 h1.27 r180; Top 3D Body "*" at 144.197,70.254 h1.27 r180
U8_source_iref5: Top Overlay "*" at 166.773,69.289 h1.27 r180; Top 3D Body "*" at 165.922,70.254 h1.27 r180
U8_source_iref_01: Top Overlay "*" at 90.098,69.289 h1.27 r180; Top 3D Body "*" at 89.247,70.254 h1.27 r180
U8_source_iref_02: Top Overlay "*" at 111.848,69.289 h1.27 r180; Top 3D Body "*" at 110.997,70.254 h1.27 r180
U8_source_iref_03: Top Overlay "*" at 133.524,69.286 h1.27 r180; Top 3D Body "*" at 132.673,70.252 h1.27 r180
U8_source_iref_04: Top Overlay "*" at 155.223,69.289 h1.27 r180; Top 3D Body "*" at 154.372,70.254 h1.27 r180
U9: Top Overlay "*" at 148.302,161.843 h1.27; Top 3D Body "*" at 149.899,161.453 h1.27
U19: Bottom Overlay "*" at 177.98,136.775 h1.27 r180; Bottom 3D Body "*" at 179.991,137.672 h1.27 r180
U20: Top Overlay "*" at 104.831,129.255 h1.27 r90; Top 3D Body "*" at 106.012,130.62 h1.27 r90
U21: Top Overlay "*" at 102.344,171.934 h1.27 r270; Top 3D Body "*" at 101.163,170.568 h1.27 r270
U22_source_iref1: Top Overlay "*" at 72.215,67.469 h1.27; Top 3D Body "*" at 73.587,66.326 h1.27
U22_source_iref2: Top Overlay "*" at 93.84,67.469 h1.27; Top 3D Body "*" at 95.212,66.326 h1.27
U22_source_iref3: Top Overlay "*" at 115.715,67.469 h1.27; Top 3D Body "*" at 117.087,66.326 h1.27
U22_source_iref4: Top Overlay "*" at 137.365,67.469 h1.27; Top 3D Body "*" at 138.737,66.326 h1.27
U22_source_iref5: Top Overlay "*" at 159.09,67.469 h1.27; Top 3D Body "*" at 160.462,66.326 h1.27
U22_source_iref_01: Top Overlay "*" at 82.415,67.469 h1.27; Top 3D Body "*" at 83.787,66.326 h1.27
U22_source_iref_02: Top Overlay "*" at 104.165,67.469 h1.27; Top 3D Body "*" at 105.537,66.326 h1.27
U22_source_iref_03: Top Overlay "*" at 125.841,67.466 h1.27; Top 3D Body "*" at 127.212,66.323 h1.27
U22_source_iref_04: Top Overlay "*" at 147.54,67.469 h1.27; Top 3D Body "*" at 148.912,66.326 h1.27
U30: Top Overlay "*" at 68.218,112.314 h1.27 r180; Top 3D Body "*" at 68.218,115.133 h1.27 r180
U33: Top Overlay "*" at 104.125,92.175 h1.27 r180; Top 3D Body "*" at 101.64,92.894 h1.27 r180
U51: Top Overlay "*" at 188.35,142.775 h1.27 r90; Top 3D Body "*" at 189.217,144.621 h1.27 r90
U52: Top Overlay "*" at 140.905,187.517 h1.27 r270; Top 3D Body "*" at 140.905,186.628 h1.27 r270
U53: Top Overlay "*" at 111.164,187.517 h1.27 r270; Top 3D Body "*" at 111.164,186.628 h1.27 r270
U54: Top Overlay "*" at 125.985,187.517 h1.27 r270; Top 3D Body "*" at 125.985,186.628 h1.27 r270
U55: Top Overlay "*" at 155.675,187.517 h1.27 r270; Top 3D Body "*" at 155.675,186.628 h1.27 r270
U56: Top Overlay "*" at 170.543,187.528 h1.27 r270; Top 3D Body "*" at 170.543,186.639 h1.27 r270
U57: Top Overlay "*" at 185.363,187.527 h1.27 r270; Top 3D Body "*" at 185.363,186.638 h1.27 r270
U58: Top Overlay "*" at 81.572,187.528 h1.27 r270; Top 3D Body "*" at 81.572,186.639 h1.27 r270
U59: Top Overlay "*" at 96.236,187.492 h1.27 r270; Top 3D Body "*" at 96.236,186.603 h1.27 r270